# Altium PCB MSXII-Controller-Breakout.PcbDoc
Units mil, origin at the board's own origin, x right, y up, seen from the top; angles counter-clockwise.
Board outline 1968.5 x 984.25 mil, 4 copper layers (Top Layer, Signal Layer 1, Signal Layer 2, Bottom Layer), stack 30.635 mil thick; 4 components, 32 nets, 147 pads, 22 vias.
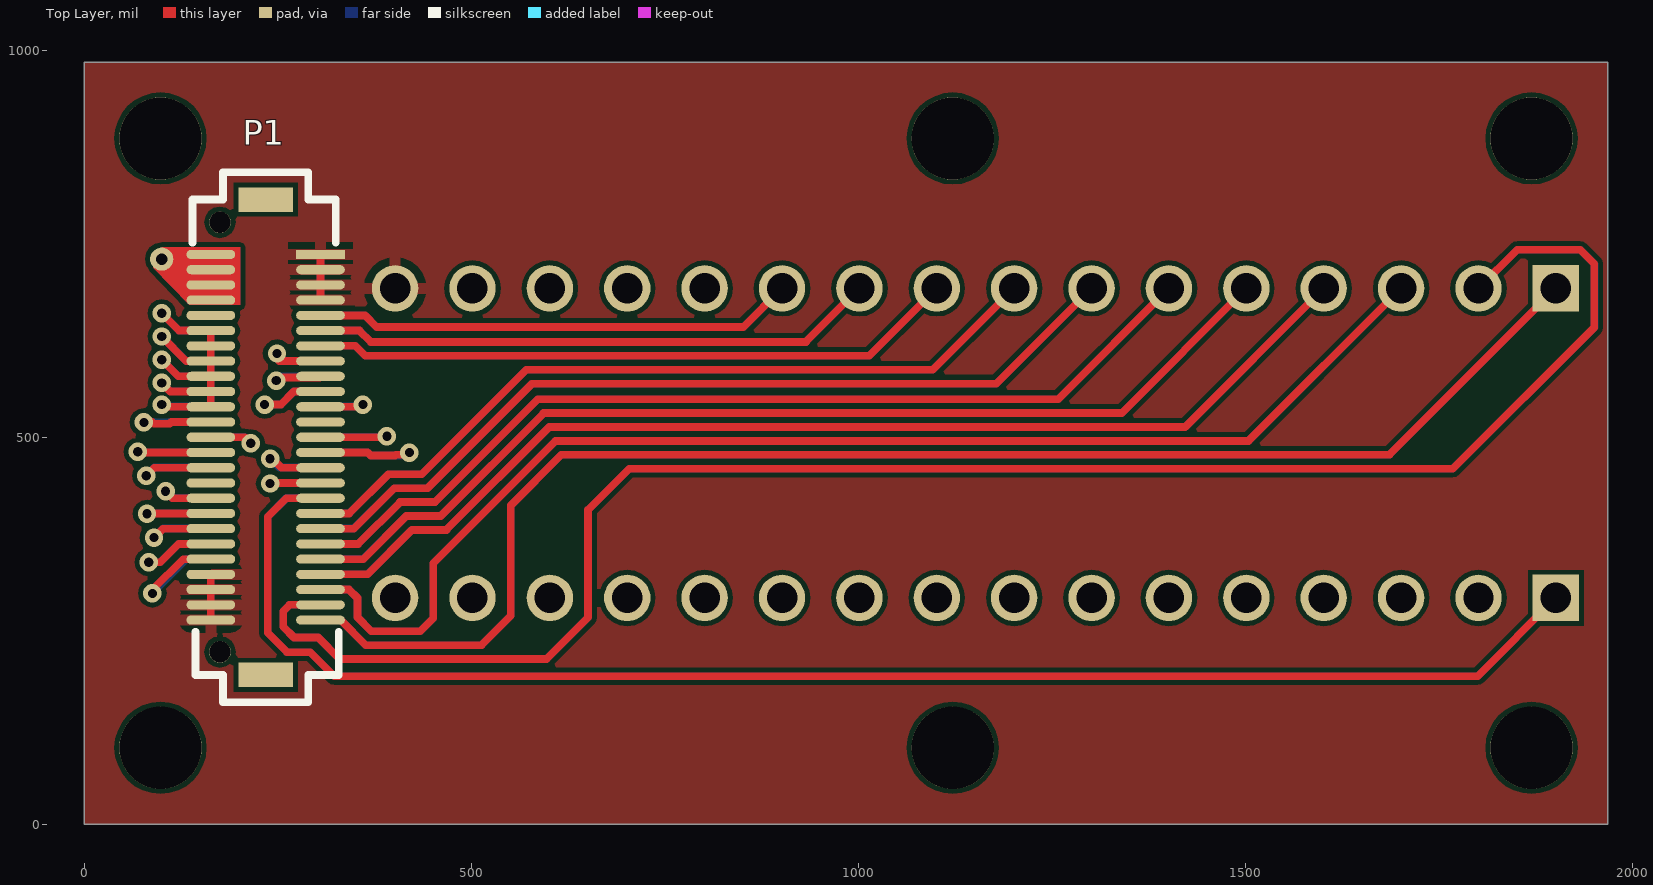
[diagram p0: Top Layer view]
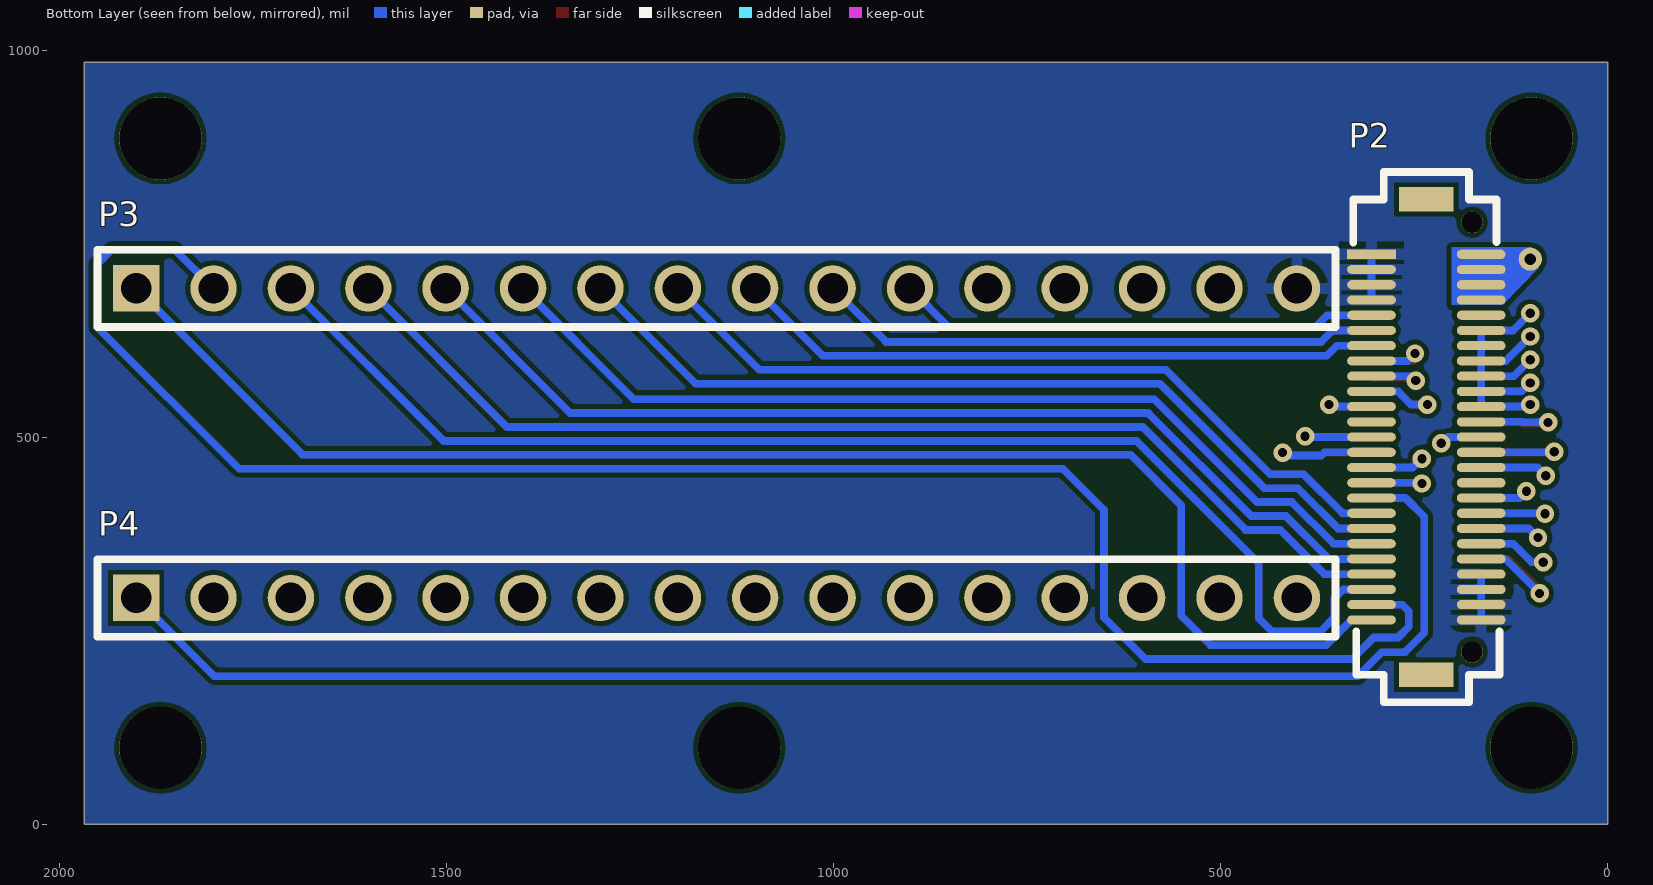
[diagram p1: Bottom Layer view, seen from below]
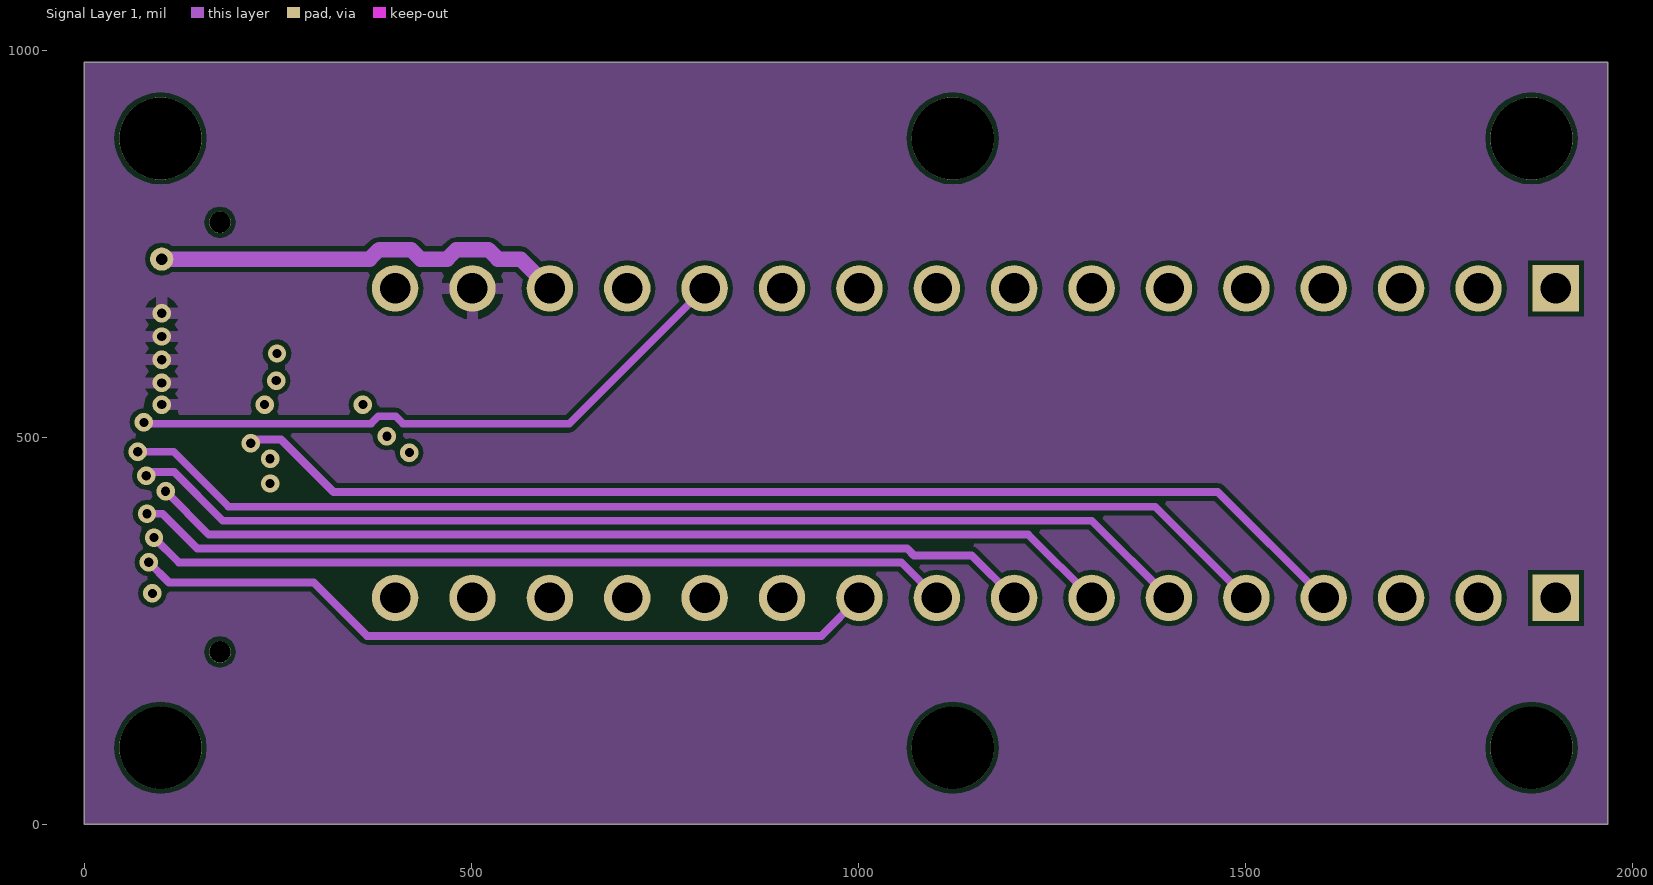
[diagram p2: Signal Layer 1]
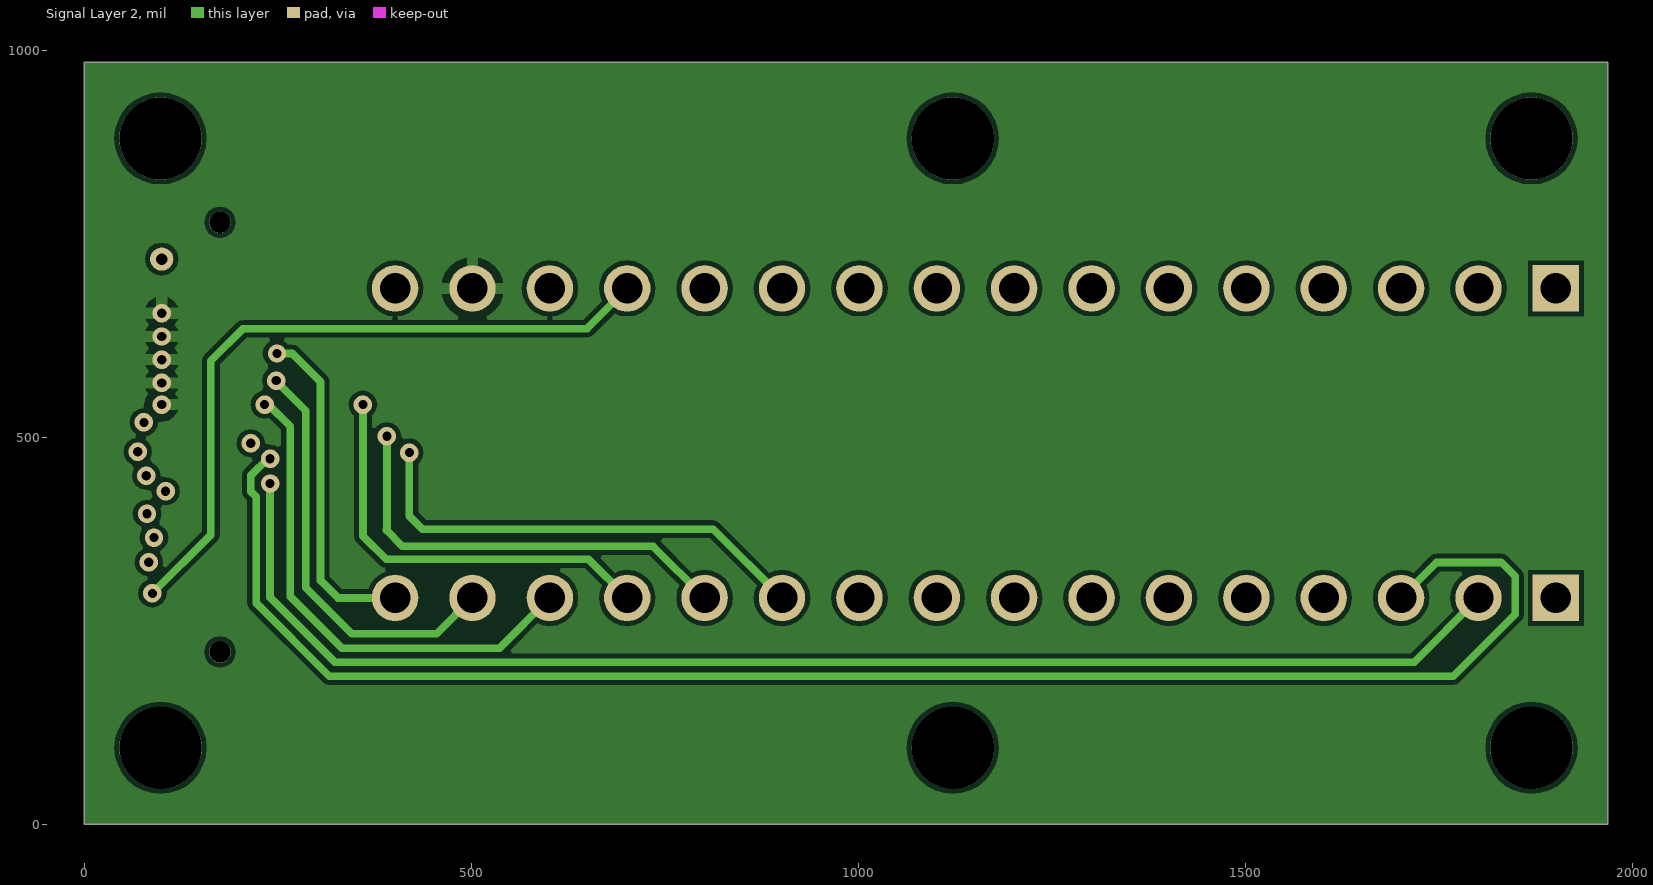
[diagram p3: Signal Layer 2]

## Layer stack, top to bottom
Top Solder: solder mask 0.4, Solder Resist, Dk 3.5
Top Layer: signal copper 1.4
Dielectric 1: core 10, FR-4, Dk 4.2
Signal Layer 1: signal copper 1.4173
Dielectric 3: prepreg 5, FR-4, Dk 4.2
Signal Layer 2: signal copper 1.4173
Dielectric 2: core 10, FR-4, Dk 4.2
Bottom Layer: signal copper 1.4
Bottom Solder: solder mask 0.4, Solder Resist, Dk 3.5

## Board outline
0,0 1220.47,0 1968.5,0 1968.5,984.25 1220.47,984.25 0,984.25

## Design rules (kind name [scope] priority, off if disabled: settings)
Clearance [All] p1: gap=6
HoleToHoleClearance [All] p1: gap=8 allowstackedmicrovias=TRUE
PolygonConnect [All] p1: connectstyle=Relief reliefconductorwidth=15 reliefentries=4 polygonreliefangle="90 Angle" airgapwidth=10
RoomDefinition Controller_Board_Interface [(InComponentClass('Inside Board Components'))] p1: confinementstyle=ConfineIn formatcopy=TRUE lockcomponents=FALSE outline 0,0 1220.47,0 1220.47,984.25 0,984.25
RoutingVias [All] p1: holewidth=28 width=50 viastyle="Through Hole" minholewidth=11.81 minwidth=15 maxholewidth=28 maxwidth=50
SolderMaskExpansion [All] p1: expansion=4
Width [All] p1: maxlimit=100 minlimit=6 preferedwidth=10
29 further rules are at their usual default settings.

## Classes and differential pairs
component class Controller_Board_Interface: P1

## Components (designator, comment, footprint, x,y, rotation, side; value= is the part's Value field where it differs from the comment)
P1 "BergStak Plug" "Bergstak 50 Pos Plug" 234.34,499.76 r0 top locked
P2 "BergStak Receptacle" "Bergstak 50 Pos Receptacle" 234.34,480.32 r0 bottom locked
P3 "CONN HEADER .100\" SNGL STR 16POS" "CONN HEADER .100\" SNGL STR 16POS" 1901.57,692.13 r180 bottom
P4 "CONN HEADER .100\" SNGL STR 16POS" "CONN HEADER .100\" SNGL STR 16POS" 1901.57,292.13 r180 bottom

## Footprints (in the part's own frame and the unit in brackets; to place one, negate y for a bottom-side part, rotate by r counter-clockwise, add the part's x,y. Pads: shape width x height; smd on the part's side, far side on the other; paste and mask are expansions set on the pad)
"Bergstak 50 Pos Plug" [mm] "Bergstak 50 Position Plug"
  rect 1.6x0.3 smd: 1(1.8,6)
  oval 1.6x0.3 smd: 2(1.8,5.5) 3(1.8,5) 4(1.8,4.5) 5(1.8,4) 6(1.8,3.5) 7(1.8,3) 8(1.8,2.5) 9(1.8,2) 10(1.8,1.5) 11(1.8,1) 12(1.8,0.5) 13(1.8,0) 14(1.8,-0.5) 15(1.8,-1) 16(1.8,-1.5) 17(1.8,-2) 18(1.8,-2.5) 19(1.8,-3) 20(1.8,-3.5) 21(1.8,-4) 22(1.8,-4.5) 23(1.8,-5) 24(1.8,-5.5) 25(1.8,-6) 26(-1.8,-6) 27(-1.8,-5.5) 28(-1.8,-5) 29(-1.8,-4.5) 30(-1.8,-4) 31(-1.8,-3.5) 32(-1.8,-3) 33(-1.8,-2.5) 34(-1.8,-2) 35(-1.8,-1.5) 36(-1.8,-1) 37(-1.8,-0.5) 38(-1.8,0) 39(-1.8,0.5) 40(-1.8,1) 41(-1.8,1.5) 42(-1.8,2) 43(-1.8,2.5) 44(-1.8,3) 45(-1.8,3.5) 46(-1.8,4) 47(-1.8,4.5) 48(-1.8,5) 49(-1.8,5.5) 50(-1.8,6)
  round 0.7 hole 0.7: ""(-1.5,-7.05) ""(-1.5,7.05)
  rect 1.8x0.8 smd: ""(0,-7.8) ""(0,7.8)
  silkscreen extent -2.4,-8.7 2.4,8.7
"Bergstak 50 Pos Receptacle" [mm] "Bergstak 50 Position Receptacle"
  rect 1.6x0.3 smd: 1(1.8,-6.5)
  oval 1.6x0.3 smd: 2(1.8,-6) 3(1.8,-5.5) 4(1.8,-5) 5(1.8,-4.5) 6(1.8,-4) 7(1.8,-3.5) 8(1.8,-3) 9(1.8,-2.5) 10(1.8,-2) 11(1.8,-1.5) 12(1.8,-1) 13(1.8,-0.5) 14(1.8,0) 15(1.8,0.5) 16(1.8,1) 17(1.8,1.5) 18(1.8,2) 19(1.8,2.5) 20(1.8,3) 21(1.8,3.5) 22(1.8,4) 23(1.8,4.5) 24(1.8,5) 25(1.8,5.5) 26(-1.8,5.5) 27(-1.8,5) 28(-1.8,4.5) 29(-1.8,4) 30(-1.8,3.5) 31(-1.8,3) 32(-1.8,2.5) 33(-1.8,2) 34(-1.8,1.5) 35(-1.8,1) 36(-1.8,0.5) 37(-1.8,0) 38(-1.8,-0.5) 39(-1.8,-1) 40(-1.8,-1.5) 41(-1.8,-2) 42(-1.8,-2.5) 43(-1.8,-3) 44(-1.8,-3.5) 45(-1.8,-4) 46(-1.8,-4.5) 47(-1.8,-5) 48(-1.8,-5.5) 49(-1.8,-6) 50(-1.8,-6.5)
  round 0.7 hole 0.7: ""(-1.5,-7.55) ""(-1.5,6.55)
  rect 1.8x0.8 smd: ""(0,-8.3) ""(0,7.3)
  silkscreen extent -2.4,-9.2 2.4,8.2
"CONN HEADER .100\" SNGL STR 16POS" [mil] "16 Positions Header, Breakaway Connector 0.100\" (2.54mm) Through Hole Gold"
  rect 60x60 hole 39.37: 1(0,0)
  round 60 hole 39.37: 2(100,0) 3(200,0) 4(300,0) 5(400,0) 6(500,0) 7(600,0) 8(700,0) 9(800,0) 10(900,0) 11(1000,0) 12(1100,0) 13(1200,0) 14(1300,0) 15(1400,0) 16(1500,0)
  silkscreen extent -50,-50 1550,50

## Part data
P1: library part "BergStak 50 Position Connector Plug", "50 Position Connector Plug, Outer Shroud Contacts Surface Mount Gold"
P2: library part "BergStak 50 Position Connector Receptacle", "50 Position Connector Receptacle, Center Strip Contacts Surface Mount Gold"
P3 P4: "16 Positions Header, Breakaway Connector 0.100\" (2.54mm) Through Hole Gold"

## Free pads (board coordinates)
  round 30 hole 15: 2(100,730)
  round 106.3 hole 106.3: ""(98.43,98.43) ""(98.43,885.83) ""(1122.05,98.43) ""(1122.05,885.83) ""(1870.08,98.43) ""(1870.08,885.83)

## Via types
v1: diameter 23.81, hole 11.81, Top Layer to Bottom Layer, tented both sides, 22 vias

## Nets (pads, with @x,y where several pads share a name; then routed paths per layer and width w, separated by ;. In a path a pad name is that pad's centre, name@x,y a point inside that pad or via, vN(x,y) a via of type N, cw(c..) or ccw(c..) an arc to the next point about the centre after c; other vN are vias at no path point)
3V3: P1.40 P1.41 P1.42 P1.43 P1.44 P1.45 P2.40 P2.41 P2.42 P2.43 P2.44 P2.45 P3.15 | length 923.1
  Top Layer w10: v1(100,542) 100,540 100.87,539.13 P1.40 ; v1(100,570) 111.18,558.82 P1.41 ; v1(100,600) 121.5,578.5 P1.42 ; v1(100,630) 131.81,598.19 P1.43 ; v1(100,660) 122.44,637.56 P1.45 P1.44 ; P1.44@142.13,617.87 P1.44 ; P1.40@163.47,540.35 P1.41 ; P1.41 P1.42 ; P1.42 P1.43 ; P1.43 P1.44
  Bottom Layer w10: v1(100,570) 110.95,559.05 P2.41 ; v1(100,600) 121.26,578.74 P2.42 ; v1(100,630) 131.58,598.42 P2.43 ; v1(100,660) 122.21,637.79 P2.45 P2.44 P2.43 ; v1@102.63,539.37 P2.40 P2.41 ; P2.41 P2.42 ; P2.42 P2.43
+12V: P1.47 P1.48 P1.49 P1.50 P2.47 P2.48 P2.49 P2.50 P3.14 pad.2 | length 652
  Top Layer w10: P1.47@163.47,678.15 P1.48 P1.49 P1.50
  Signal Layer 1 w20: pad.2 368.74,730 380.86,742.13 422.29,742.13 434.41,730 468.74,730 480.86,742.13 522.29,742.13 534.41,730 563.7,730 P3.14
  Bottom Layer w10: P2.47@163.47,679.39 P2.48 P2.49 P2.50
GND: P1.1 P1.2 P1.3 P1.4 P1.26 P1.27 P1.28 P1.29 P2.1 P2.2 P2.3 P2.4 P2.26 P2.27 P2.28 P2.29 P3.16 | length 235
  Top Layer w10: P1.26 P1.27 P1.28 P1.29 ; P1.4@305.2,678.15 P1.3 P1.2 P1.1
  Bottom Layer w10: P2.26 P2.27 P2.28 P2.29 ; P2.4 P2.3 P2.2 P2.1
PA0: P1.25 P2.25 P3.1 | length 3768.6
  Top Layer w10: P1.25 331.13,263.54 363.54,231.13 513.13,231.13 551,269 551,411.54 616.46,477 1686.45,477 P3.1
  Bottom Layer w10: P2.25 330.89,263.78 363.54,231.13 513.13,231.13 551,269 551,411.54 616.46,477 1686.45,477 P3.1
PA1: P1.24 P2.24 P3.2 | length 4604.4
  Top Layer w10: P1.24 265.23,283.23 257,275 257,255 271,241 302.29,241 330.17,213.13 597.13,213.13 651,267 651,406 704,459 1768.45,459 1951,641.55 1951,724 1932.87,742.13 1851.57,742.13 P3.2
  Bottom Layer w10: P2.24 265.46,283.46 257,275 257,255 271,241 302.29,241 330.17,213.13 597.13,213.13 651,267 651,406 704,459 1768.45,459 1951.57,642.13 1951.57,723.43 1932.87,742.13 1851.57,742.13 P3.2
PA2/USART2_TX: P1.23 P2.23 P3.3 | length 3316.7
  Top Layer w10: P1.23 342.09,302.91 353,292 353,267.13 371,249.13 434.13,249.13 451,266 451,337 609,495 1504.45,495 P3.3
  Bottom Layer w10: P2.23 341.85,303.15 353,292 353,267.13 371,249.13 434.13,249.13 451,266 451,337 609,495 1504.45,495 P3.3
PA3/USART2_RX: P1.22 P2.22 P3.4 | length 2898.8
  Top Layer w10: P1.22 366.06,322.6 423.46,380 467.91,380 600.91,513 1422.45,513 P3.4
  Bottom Layer w10: P2.22 365.82,322.83 422.99,380 467.91,380 600.91,513 1422.45,513 P3.4
PA4/SPI1_NSS: P1.21 P2.21 P3.5 | length 2682.5
  Top Layer w10: P1.21 360.28,342.28 416,398 460.46,398 593.46,531 1340.45,531 P3.5
  Bottom Layer w10: P2.21 360.52,342.52 416,398 460.46,398 593.46,531 1340.45,531 P3.5
PA5/SPI1_SCK: P1.20 P2.20 P3.6 | length 2466.2
  Top Layer w10: P1.20 353.97,361.97 408,416 453,416 586,549 1258.45,549 P3.6
  Bottom Layer w10: P2.20 354.2,362.2 408,416 453,416 586,549 1258.45,549 P3.6
PA6/SPI1_MISO: P1.19 P2.19 P3.7 | length 2249.8
  Top Layer w10: P1.19 348.11,381.65 400.46,434 443.46,434 578.46,569 1178.45,569 P3.7
  Bottom Layer w10: P2.19 348.35,381.89 400.46,434 443.46,434 578.46,569 1178.45,569 P3.7
PA7/SPI1_MOSI: P1.18 P2.18 P3.8 | length 2038
  Top Layer w10: P1.18 P1.18@310.98,401.34 ; P1.18@315.15,402.12 311.76,402.12 P1.18@310.98,401.34 ; P3.8 1096.45,587 571,587 436,452 393,452 342.34,401.34 P1.18@310.98,401.34
  Bottom Layer w10: P2.18 342.57,401.57 393,452 436,452 571,587 1096.45,587 P3.8
PA8: P1.7 P2.7 P3.9 | length 1675.7
  Top Layer w10: P1.7 350.13,617.87 363,605 1014.45,605 P3.9
  Bottom Layer w10: P2.7 349.89,618.11 363,605 1014.45,605 P3.9
PA9: P1.6 P2.6 P3.10 | length 1462.2
  Top Layer w10: P1.6 355.44,637.56 370,623 932.45,623 P3.10
  Bottom Layer w10: P2.6 355.21,637.79 370,623 932.45,623 P3.10
PA10: P1.5 P2.5 P3.11 | length 1246.8
  Top Layer w10: P1.5 362.76,657.24 377.87,642.13 851.57,642.13 P3.11
  Bottom Layer w10: P2.5 362.52,657.48 377.87,642.13 851.57,642.13 P3.11
PA15: P1.39 P2.39 P3.12 | length 970.3
  Top Layer w10: v1@87.33,519.45 89.68,517.09 110.32,517.09 112.67,519.45 P1.39
  Signal Layer 1 w10: v1@77,517.09 370.32,517.09 379.97,526.75 402.25,526.75 411.91,517.09 626.54,517.09 P3.12
  Bottom Layer w10: v1(77,519) 77.68,519.68 89.92,519.68 90.51,519.09 109.49,519.09 110.08,519.68 P2.39
PB0: P1.17 P2.17 P4.1 | length 3915.7
  Top Layer w10: P1.17 261.02,421.02 237,397 237,247 262,222 292,222 323,191 1800.45,191 P4.1
  Bottom Layer w10: P2.17 261.26,421.26 237,397 237,247 262,222 292,222 323,191 1800.45,191 P4.1
PB1: P1.16 P2.16 P4.2 | length 1906.6
  Top Layer w10: v1@240.71,440.71 P1.16
  Signal Layer 2 w10: v1(240,440) 240,293 324,209 1718.45,209 P4.2
  Bottom Layer w10: v1@240.94,440.94 P2.16
PB2: P1.15 P2.15 P4.3 | length 2260
  Top Layer w10: v1@243.22,472 254.83,460.39 P1.15
  Signal Layer 2 w10: v1(240,472) 236.78,472 215.09,450.32 215.09,429.68 222,422.78 222,285.54 316.54,191 1769,191 1849,271 1849,320 1831,338 1747.45,338 P4.3
  Bottom Layer w10: v1@240.39,472 251.76,460.63 P2.15
PB3: P1.38 P2.38 P4.4 | length 1572
  Top Layer w10: P1.38 v1@207.24,499.76
  Signal Layer 1 w10: v1(215,492) 219.91,496.91 254.09,496.91 322,429 1464.7,429 P4.4
  Bottom Layer w10: P2.38 207,500 v1(215,492)
PB4: P1.37 P2.37 P4.5 | length 1698.1
  Top Layer w10: v1@69.92,480.08 P1.37
  Signal Layer 1 w10: v1(69,481) 115.46,481 186.46,410 1383.7,410 P4.5
  Bottom Layer w10: v1@69.69,480.31 P2.37
PB5: P1.36 P2.36 P4.6 | length 1566.7
  Top Layer w10: v1(80,450) 90.39,460.39 P1.36
  Signal Layer 1 w10: v1(80,450) 84.91,454.91 116.09,454.91 179,392 1301.7,392 P4.6
  Bottom Layer w10: v1(80,450) 90.63,460.63 P2.36
PB6/USART1_TX: P1.34 P2.34 P4.7 | length 1365.3
  Top Layer w10: 113.98,421.02 P1.34
  Signal Layer 1 w10: v1(105,430) 161,374 1219.7,374 P4.7
  Bottom Layer w10: v1(105,430) 113.74,421.26 P2.34
PB7/USART1_RX: P1.33 P2.33 P4.8 | length 1329.7
  Top Layer w10: v1@81.34,401.34 P1.33
  Signal Layer 1 w10: v1(81,401) 101,401 146,356 1063.16,356 1072.16,347 1146.7,347 P4.8
  Bottom Layer w10: v1@81.57,401.57 P2.33
PB8/I2C1_SCL: P1.32 P2.32 P4.9 | length 1200.5
  Top Layer w10: v1(90,370) 101.65,381.65 P1.32
  Signal Layer 1 w10: v1(90,370) 122,338 1055.7,338 P4.9
  Bottom Layer w10: v1(90,370) 101.89,381.89 P2.32
PB9/I2C1_SDA: P1.31 P2.31 P4.10 | length 1158.5
  Top Layer w10: v1(83.2,338.19) 98.19,338.19 121.97,361.97 P1.31
  Signal Layer 1 w10: v1(83.2,338.19) 109.39,312 296.35,312 365.35,243 952.45,243 P4.10
  Bottom Layer w10: v1(83.2,338.19) 98.19,338.19 122.2,362.2 P2.31
PB10/USART3_TX/I2C2_SCL: P1.14 P2.14 P4.11 | length 834
  Top Layer w10: P1.14 366.02,480.08 370,476.09 401.32,476.09 402.32,477.09 v1@417.09,477.09
  Signal Layer 2 w10: v1(420,480) 420,398 437,381 812.7,381 P4.11
  Bottom Layer w10: P2.14 365.78,480.31 370,476.09 v1@416.09,476.09
PB11/USART3_RX/I2C2_SDA: P1.13 P2.13 P4.12 | length 738.7
  Top Layer w10: P1.13 v1@389.76,499.76
  Signal Layer 2 w10: v1(391,501) 391,381 390,380 411,359 734.7,359 P4.12
  Bottom Layer w10: P2.13 v1@390,500
PB12/SPI2_NSS: P1.11 P2.11 P4.13 | length 650.7
  Top Layer w10: P1.11 v1@359.13,539.13
  Signal Layer 2 w10: v1(360,542) 360,372.13 390,342.13 651.57,342.13 P4.13
  Bottom Layer w10: P2.11 v1@357.37,539.37
PB13/SPI2_SCK: P1.10 P2.10 P4.14 | length 813.3
  Top Layer w10: v1(233,542) 254,542 270.82,558.82 P1.10
  Signal Layer 2 w10: v1(233,542) 238,542 266,514 266,294 333,227 536.45,227 P4.14
  Bottom Layer w10: v1(233,542) 254,542 271.05,559.05 P2.10
PB14/SPI2_MISO: P1.9 P2.9 P4.15 | length 643
  Top Layer w10: v1@257.09,577.09 303.79,577.09 P1.9
  Signal Layer 2 w10: v1(248,573) 248,572 286,534 286,305.38 345.58,245.8 455.25,245.8 P4.15
  Bottom Layer w10: v1@253.74,578.74 P2.9
PB15/SPI2_MOSI: P1.8 P2.8 P4.16 | length 547.3
  Top Layer w10: v1@251.81,598.19 P1.8
  Signal Layer 2 w10: v1(249,608) 268.7,608 305.2,571.49 305.2,314.8 327.87,292.13 P4.16
  Bottom Layer w10: v1(249,608) 258.58,598.42 P2.8
PC13: P1.30 P2.30 P3.13 | length 1099
  Top Layer w10: v1(88,298) 88,302.54 127.74,342.28 P1.30
  Signal Layer 2 w10: v1(88,298) 163.47,373.47 163.47,598.42 205.05,640 649.45,640 P3.13
  Bottom Layer w10: v1(88,298) 132.52,342.52 P2.30
pads on no net: P1. P1.12 P1.35 P1.46 P2. P2.12 P2.35 P2.46

## Polygon pours and split planes (outlines as drawn)
3V3 on Signal Layer 1 "3V3" (solid, remove dead copper, pour order 2): 0,0 1968.5,0 1968.5,984.25 0,984.25 0,0
GND on Top Layer "GND" (solid, remove dead copper, pour order 4): 1968.5,984.25 1968.5,0 0,0 0,984.25
GND on Bottom Layer "GND" (solid, remove dead copper, pour order 10): 0,984.25 0,0 1968.5,0 1968.5,984.25
3V3 on Signal Layer 2 "3V3" (solid, remove dead copper, pour order 12): 0,984.25 0,0 1968.5,0 1968.5,984.25

## Other copper
Top Layer:
  region net +12V: 89,719 135.28,670.72 201.24,670.72 201.24,745 100,745
Bottom Layer:
  region net +12V: 89,719 135.28,670.72 201.24,670.72 201.24,745 100,745